# Altium PCB ic555 tao xung.PcbDoc
Units mil, origin at the board's own origin, x right, y up, seen from the top; angles counter-clockwise.
Board outline 2375 x 1385 mil, 2 copper layers (Top Layer, Bottom Layer); 12 components, 9 nets, 41 pads, 0 vias.
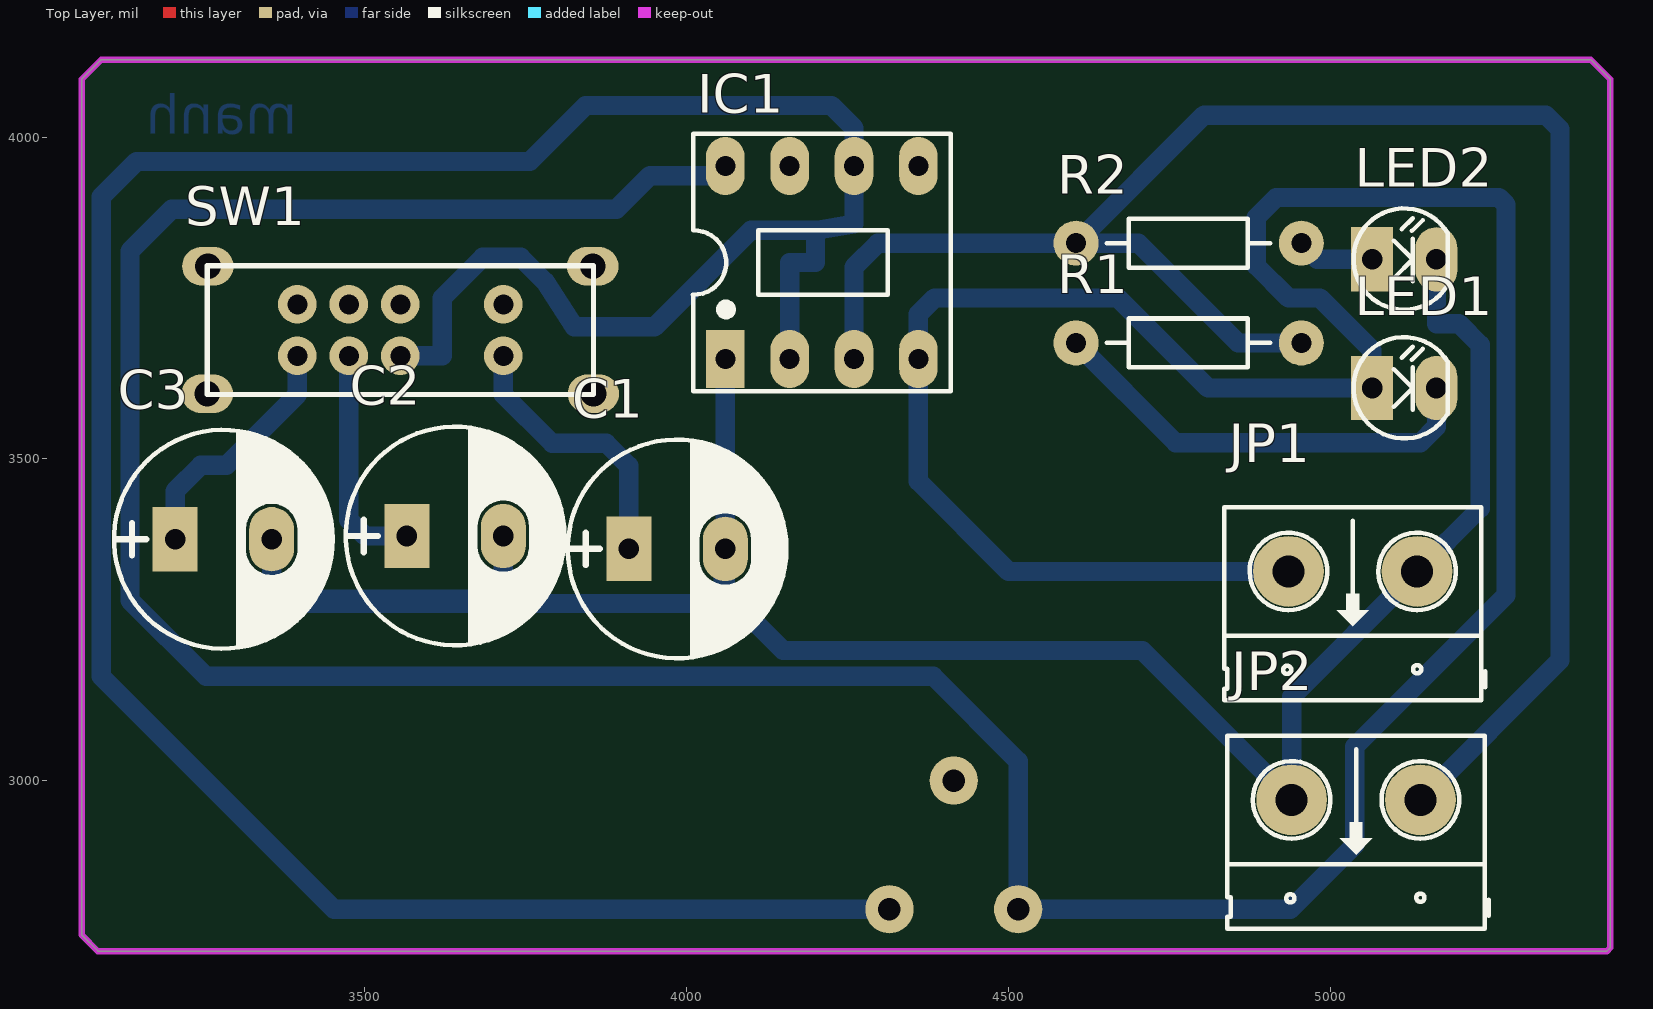
[diagram p0: Top Layer view]
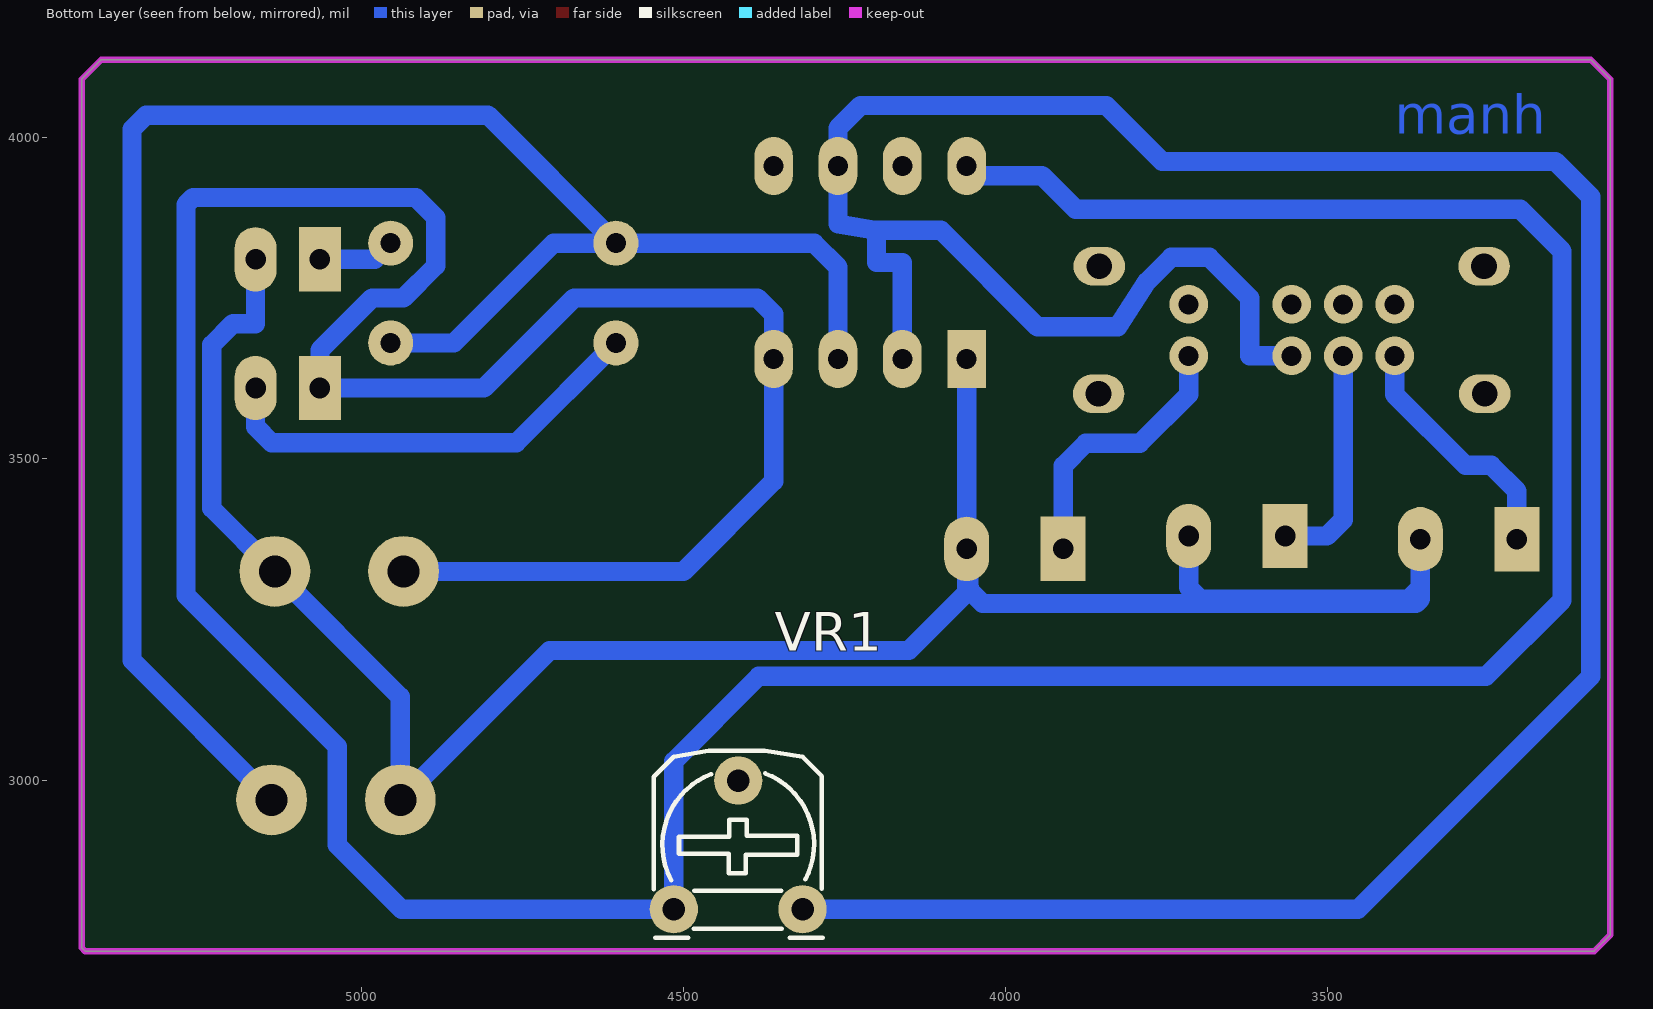
[diagram p1: Bottom Layer view, seen from below]
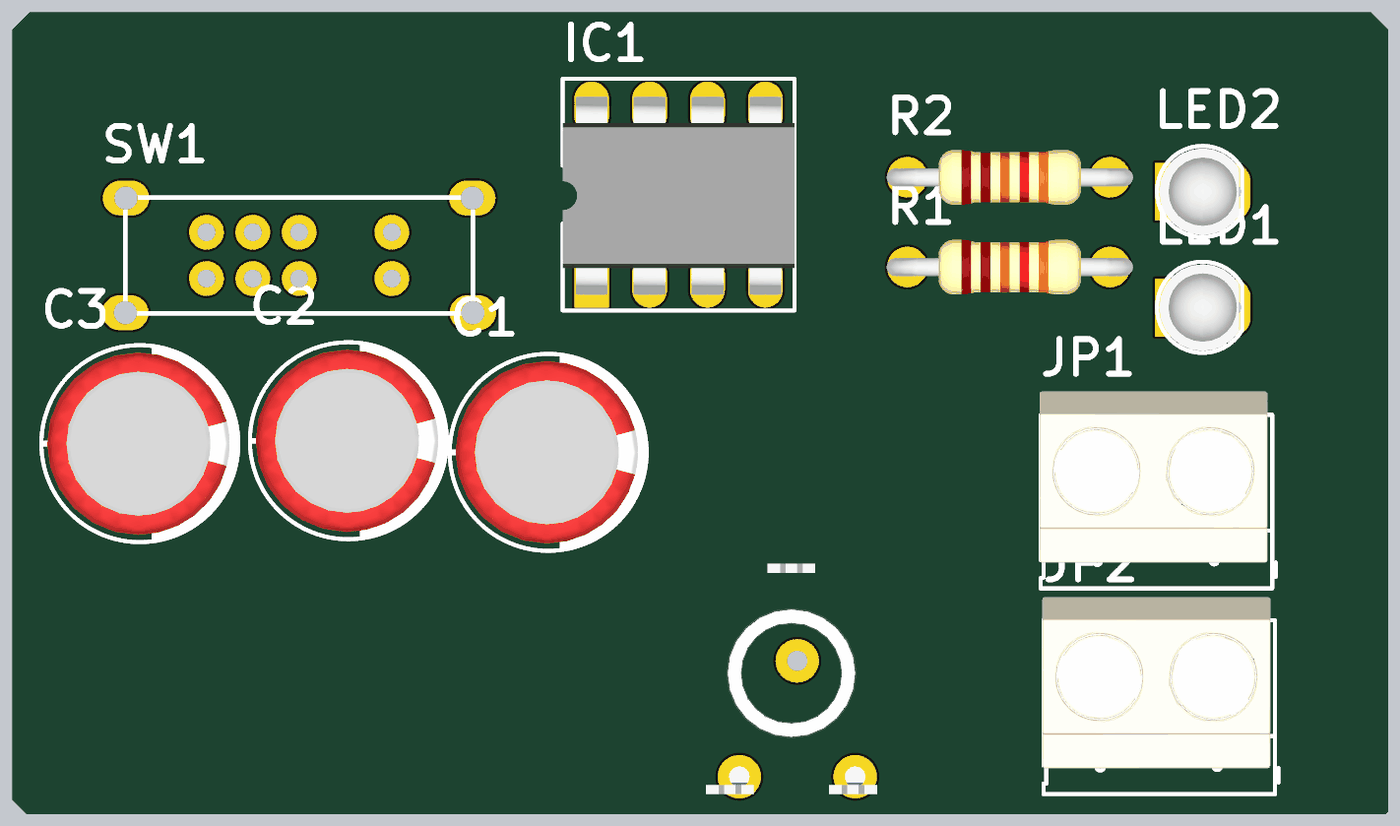
[diagram p2: 3D render of the assembled board from above, using the file's embedded part models]

## Layer stack, top to bottom
Top Solder: solder mask 0.4, Solder Resist, Dk 3.5
Top Layer: signal copper 1.4
Dielectric 1: dielectric 12.6, FR-4, Dk 4.8
Bottom Layer: signal copper 1.4
Bottom Solder: solder mask 0.4, Solder Resist, Dk 3.5

## Board outline
3060,2760 3060,4090 3090,4120 5405,4120 5435,4090 5435,2740 5430,2735 3085,2735

## Design rules (kind name [scope] priority, off if disabled: settings)
Clearance [All] p1: gap=10 ignorepadtopadclearanceinfootprint=FALSE except(0: Arc-Hole Track-Hole SMDPad-Hole THPad-Hole Via-Hole Fill-Hole Poly-Hole Region-Hole Text-Hole; 20: Arc-THPad Track-THPad)
PolygonConnect [All] p1: connectstyle=Relief reliefconductorwidth=10 reliefentries=4 polygonreliefangle="90 Angle" airgapwidth=10
RoutingLayers [All] p1: top layer_v5=FALSE bottom layer_v5=TRUE
RoutingVias [All] p1: holewidth=28 width=50 viastyle="Through Hole" minholewidth=28 minwidth=50 maxholewidth=28 maxwidth=50
SolderMaskExpansion [All] p1: expansion=4 istentingtop=FALSE
Width [All] p1: maxlimit=40 minlimit=20 preferedwidth=30
29 further rules are at their usual default settings.

## Components (designator, comment, footprint, x,y, rotation, side; value= is the part's Value field where it differs from the comment)
C1 "10uF" CP1.5/3.4 3910,3360 r0 top value=100uF/35V/50V
C2 "1uF" CP1.5/3.4 3565,3380 r0 top value=100uF/35V/50V
C3 "0.01uF" CP1.5/3.4 3205,3375 r0 top value=100uF/35V/50V
IC1 "LM555" DIP8/W0.3 4060,3655 r0 top
JP1 "Header 2_1" HED2 5135,3325 r180 top value="Header 2"
JP2 "Header 2_1" HED2 5140,2970 r180 top value="Header 2"
LED1 "LED" LED-3 5065,3610 r0 top value="LED 3 ly Single Colour"
LED2 "LED" LED-3 5065,3810 r0 top value="LED 3 ly Single Colour"
R1 "220" R1/4W 4955,3680 r180 top value="R1/4W - 1K"
R2 "220" R1/4W 4955,3835 r180 top value="R1/4W - 1K"
SW1 "Switch 3x2" SW3X2 3555,3660 r0 top value="Switch 4x2"
VR1 "10K" VR 4515,2800 r180 bottom value="VR 10K"

## Footprints (in the part's own frame and the unit in brackets; to place one, negate y for a bottom-side part, rotate by r counter-clockwise, add the part's x,y. Pads: shape width x height; smd on the part's side, far side on the other; paste and mask are expansions set on the pad)
CP1.5/3.4 [mil] "Tu hoa 220->470uF,16V, 470uF/16V,25V"
  rect 70x100 hole 32: 1(0,0)
  oval 70x100 hole 32: 2(150,0)
  silkscreen extent -95,-170 245,170, body extent -85,-157 230,157, height 446
DIP8/W0.3 [mil] "8 PIN, W 300mil, Pin to pin 100mil"
  rect 60x90 hole 31: 1(0,0)
  oval 60x90 hole 31: 2(100,0) 3(200,0) 4(300,0) 5(300,300) 6(200,300) 7(100,300) 8(0,300)
  silkscreen extent -50,-50 350,350, body extent -50,-40 350,336, height 201
HED2 [mil] "Header 2, 2 pin, hight 300mil, Pin to Pin 200, Colour Green"
  round 110 hole 50: 1(0,0) 2(200,0)
  silkscreen extent -106,-100 300,200, body extent -92,-140 302,155, height 394
LED-3 [mil] "LED 2 PIN, 3ly Only colour"
  rect 65x100 hole 32: 1(0,0)
  oval 65x100 hole 32: 2(100,0)
  silkscreen extent -29,-78 118,79, body extent -25,-75 113,75, height 217
R1/4W [mil] "R 1/4W, 2 Pin, 350mil"
  round 70 hole 31: 1(0,0) 2(350,0)
  silkscreen extent 48,-38 302,38, body extent -40,-47 386,47, height 111
SW3X2 [mil] "Switch 3x2 - pin to pin 80"
  oval 80x60 hole 40: 0(-300,-59) 0(-299,139) 0(299,139) 0(300,-59)
  round 60 hole 31: 1(0,0) 2(-160,0) 3(-80,0) 4(160,0) 5(0,80) 6(-160,80) 7(-80,80) 8(160,80)
  silkscreen extent -300,-60 300,140
VR [mil] "Resistor Variable"
  round 75 hole 35: 1(0,0) 2(100,200) 3(200,0)
  silkscreen extent -31,-44 231,246, body extent -87,-30 307,372, height 165

## Part data
C1 C2 C3: library part CP3, "Cap 100uF/35V - 470uF/16V", Description 1="1000uF/6,3V - 470uF/16V - 330uF - 25V", Description 2="220uF/35V - 100uF/50V - 63V - 4,7uF/200V", Description 3="22uF => 33uF100V - 3,3uF => 4,7uF/250V", Description 4="2,2uF =>3,3uF/350 - 2,2uF/400V - 1uF/450V"
IC1: "Timer"
JP1 JP2: "Header, 2-Pin", Manufacturer="Generic Components", Class=Connector
LED1 LED2: "LED Single colour Green and Red"
R1 R2: library part R1/4W, "Resistor 1/4W"
SW1: library part SW3x2
VR1: library part VR, "Var Resistor"

## Nets (pads, with @x,y where several pads share a name; then routed paths per layer and width w, separated by ;. In a path a pad name is that pad's centre, name@x,y a point inside that pad or via, vN(x,y) a via of type N, cw(c..) or ccw(c..) an arc to the next point about the centre after c; other vN are vias at no path point)
GND: C1.2 C2.2 C3.2 IC1.1 JP1.1 JP2.2 LED2.2 | length 3714.4
  Bottom Layer w30: C3.2 3355,3300 ; C2.2 3715,3300 3696.91,3281.91 3373.09,3281.91 3355,3300 ; IC1.1 C1.2 ; LED2.2 5165,3710 5200,3710 5233,3677 5233,3423 JP1.1 4940,3130 JP2.2 4708,3202 4150,3202 4056,3296 ; 3355,3300 3355,3282 3362,3275 4035,3275 4056,3296 ; 4056,3296 4060,3300 C1.2 ; 4056,3296 C1.2
NetC1_1: C1.1 SW1.4 | length 430
  Bottom Layer w30: SW1.4 3715,3600 3791,3524 3875,3524 3910,3489 C1.1
NetC2_1: C2.1 SW1.3 | length 355.4
  Bottom Layer w30: SW1.3 3475,3405 3500,3380 C2.1
NetC3_1: C3.1 SW1.2 | length 387.1
  Bottom Layer w30: C3.1 3205,3450 3245,3490 3285,3490 3395,3600 SW1.2
NetIC1_2: IC1.2 IC1.6 SW1.1 VR1.3 | length 4690.3
  Bottom Layer w30: SW1.1 3620,3660 3620,3750 3683,3813 3742,3813 3780,3775 3825,3705 3950,3705 4100,3855 4200,3855 ; IC1.2 4160,3805 4200,3805 4200,3855 ; VR1.3 3452,2800 3090,3162 3090,3907 3145,3962 3756,3962 3843,4049 4225,4049 4260,4014 IC1.6 4260,3865 4200,3855
NetIC1_3: IC1.3 JP2.1 R1.1 R2.2 | length 2893
  Bottom Layer w30: IC1.3 4260,3798 4297,3835 R2.2 ; R1.1 4857,3680 4702,3835 R2.2 ; JP2.1 5357,3187 5357,4012 5335,4034 4804,4034 R2.2
NetLED1_2: LED1.2 R1.2 | length 694.6
  Bottom Layer w30: R1.2 4760,3525 5140,3525 5165,3550 LED1.2
NetLED2_1: LED2.1 R2.1 | length 120.4
  Bottom Layer w30: R2.1 4980,3810 LED2.1
VCC: IC1.4 IC1.8 JP1.2 LED1.1 VR1.1 | length 7341.8
  Bottom Layer w30: IC1.8 4060,3940 3943,3940 3891,3888 3200,3888 3135,3823 3135,3280 3253,3162 4383,3162 4515,3030 VR1.1 4938,2800 5038,2900 5038,3053 5273,3288 5273,3895 5262,3906 4916,3906 4885,3875 4885,3800 4935,3750 4984,3750 5065,3669 LED1.1 4810,3610 4670,3750 4385,3750 4360,3725 IC1.4 4360,3465 4500,3325 JP1.2
pads on no net: IC1.5 IC1.7 SW1.0 SW1.5 SW1.6 SW1.7 SW1.8 VR1.2

## Keep-outs
Keep-Out Layer:
  lines w10: 3060,2770 3060,2760 ; 3060,2760 3085,2735 5430,2735 5435,2740 5435,4090 5405,4120 3090,4120 3060,4090 3060,2760

## Other copper
Bottom Layer:
  text "manh" at 3395,4005 h60